# EAGLE board DiffAmp_SCH (EAGLE 7.2.0)
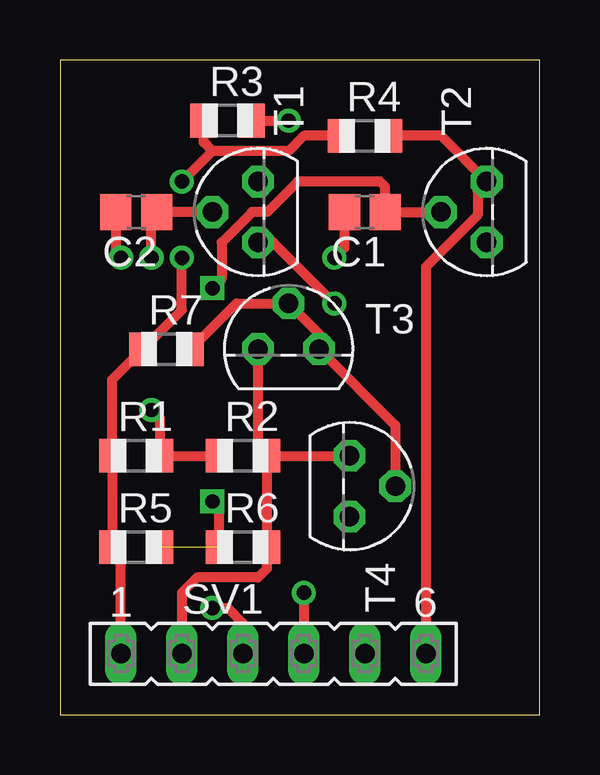
[diagram p0: board, top side]
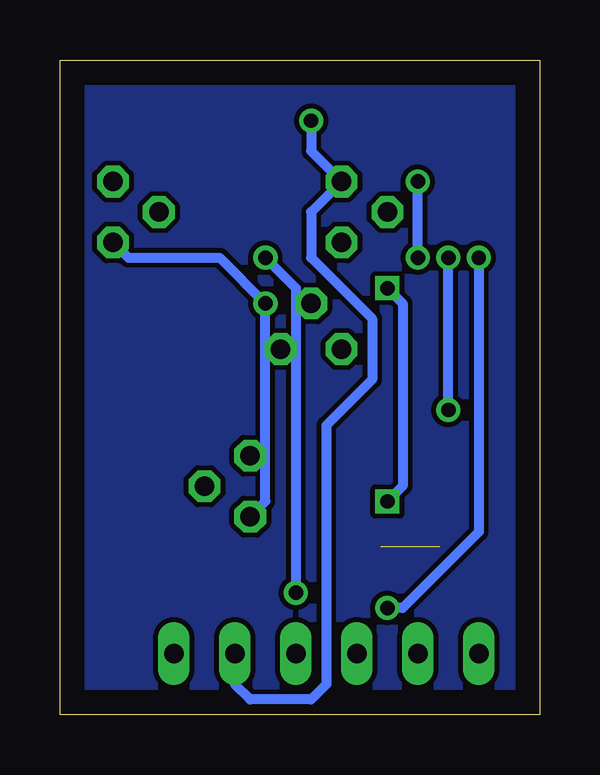
[diagram p1: board, bottom side, seen from below]

Size 19.99 x 27.3 mm. Coordinates in mm from the lower left corner, seen from the top.
Outline: 0,0 19.99,0 19.99,27.3 0,27.3 0,0
Copper layers (1*16): Top 0.035mm / dielectric 1.5mm / Bottom 0.035mm
Design rules "default": minimum track width 10mil, minimum drill 24mil, track to track 8mil, track to pad 8mil, pad to pad 8mil, via to via 8mil, smd to smd 8mil, copper to edge 40mil, drill to drill 8mil, minimum pad ring 10mil, minimum via ring 8mil, stop-mask expansion 4mil, vias tented up to drill 0mil, thermal gap 10mil

## Footprints (pad centres in the part's own frame; a part is rotated, then mirrored left to right if it is on the bottom)
C0805 = smd 1.3 x 1.5: 1 -0.85,0; 2 0.85,0
R0805 = smd 1.1 x 1.4: 1 -1,0; 2 1,0
FE06 = drill 0.813 long: 1 -6.35,0; 2 -3.81,0; 3 -1.27,0; 4 1.27,0; 5 3.81,0; 6 6.35,0
TO92 = drill 0.813 octagon: 1 1.27,0; 2 0,1.905; 3 -1.27,0

## Placement (x,y rotation side)
C1  [C0805]  12.7,20.95 180 top
C2  [C0805]  3.17,20.95 180 top
R1  [R0805]  3.17,10.79 0 top
R2  [R0805]  7.62,10.79 0 top
R3  [R0805]  6.99,24.77 0 top
R4  [R0805]  12.7,24.13 0 top
R5  [R0805]  3.17,6.99 0 top
R6  [R0805]  7.62,6.99 0 top
R7  [R0805]  4.45,15.24 0 top
SV1  [FE06]  8.89,2.54 0 top
T1  2N3904  [TO92]  8.26,20.95 90 top
T2  2N3904  [TO92]  17.78,20.95 90 top
T3  2N3904  [TO92]  9.53,15.24 0 top
T4  2N3904  [TO92]  12.06,9.53 270 top

## Library data of the parts
C1 C2 R1-R7 = adafruit
SV1 = con-lsta; OC_FARNELL: unknown; OC_NEWARK: unknown
T1-T4 = transistor

## Nets
GND: R2.2 R6.2 SV1.2 T3.3 T4.3
N$1: T1.3 T2.3 T4.1
N$2: C1.1 R5.2 R6.1 T2.2
N$3: R7.2 T3.1 T3.2 T4.2
N$8: C2.1 R1.2 R2.1 T1.2
VCC: R1.1 R3.1 R4.1 R5.1 R7.1 SV1.1
VINN: C1.2 SV1.4
VINP: C2.2 SV1.3
VOUTN: R4.2 SV1.6 T2.1
VOUTP: R3.2 SV1.5 T1.1

## Tracks (layer width: path | path; a pad name or v marks a point on that pad's centre or on a via)
GND
  Top 0.406: R2.2 R6.2 8.62,6.08 8.26,5.71 5.71,5.71 5.08,5.08 SV1.2 | R2.2 T4.3 | R2.2 8.26,11.16 T3.3
N$1  (via drill 0.6)
  Top 0.406: v11.43,17.14 8.89,19.68 T1.3
  Bottom 0.406: T4.1 11.43,8.89 v11.43,17.14 13.34,19.05 17.14,19.05 T2.3
N$2  (via drill 0.6)  (1 unrouted)
  Top 0.406: T2.2 C1.1 13.55,22.01 13.34,22.23 9.91,22.23 8.64,20.95 8,20.95 6.73,19.68 6.73,18.16 v6.35,17.78 | v6.35,8.89 6.62,8.62 R6.1
  Bottom 0.406: v6.35,17.78 5.71,17.14 5.71,9.53 v6.35,8.89
N$3
  Top 0.406: T4.2 13.97,12.06 T3.1 10.79,15.88 T3.2 7.35,17.14 R7.2
N$4
  pour Bottom: -0.64,27.94 -0.64,-0.64 20.95,-0.64 20.95,27.94
N$8  (via drill 0.6)
  Top 0.406: R2.1 R1.2 4.17,12.34 v3.81,12.7 | T1.2 C2.1 3.81,20.74 v3.81,19.05
  Bottom 0.406: v3.81,12.7 v3.81,19.05
VCC  (via drill 0.6)
  Top 0.406: SV1.1 2.54,6.62 R5.1 R1.1 2.17,13.97 R7.1 5.08,16.88 v5.08,19.05 | R4.1 10.16,24.13 9.53,23.5 6.35,23.5 | 6.35,23.5 5.99,23.86 R3.1 | v5.08,22.23 6.35,23.5
  Bottom 0.406: v5.08,19.05 v5.08,22.23
VINN  (via drill 0.6)
  Top 0.406: C1.2 11.85,19.47 v11.43,19.05 | v10.16,5.08 SV1.4
  Bottom 0.406: v11.43,19.05 10.16,17.78 v10.16,5.08
VINP  (via drill 0.6)
  Top 0.406: C2.2 2.33,19.27 v2.54,19.05 | v6.35,4.45 6.99,4.45 7.62,3.81 SV1.3
  Bottom 0.406: v2.54,19.05 2.54,7.62 5.71,4.45 v6.35,4.45
VOUTN
  Top 0.406: R4.2 15.88,24.13 T2.1 17.4,21.84 17.4,20.83 15.24,18.67 SV1.6
VOUTP  (via drill 0.6)
  Top 0.406: R3.2 v9.53,24.77
  Bottom 0.406: SV1.5 12.7,1.27 12.06,0.64 9.53,0.64 8.89,1.27 8.89,12.06 6.99,13.97 6.99,16.51 9.53,19.05 9.53,20.95 T1.1 9.53,23.5 v9.53,24.77

## Text on the board
Document: By N. Diggle / Jun 12 '16